# Altium PCB PWM_Controller_SG3525.PcbDoc
Units mm, origin at the board's own origin, x right, y up, seen from the top; angles counter-clockwise.
Board outline 45 x 40 mm, 2 copper layers (Top Layer, Bottom Layer), stack 1.071 mm thick; 44 components, 18 nets, 100 pads, 15 vias.
Unrouted connection lines stored in the file: 89.
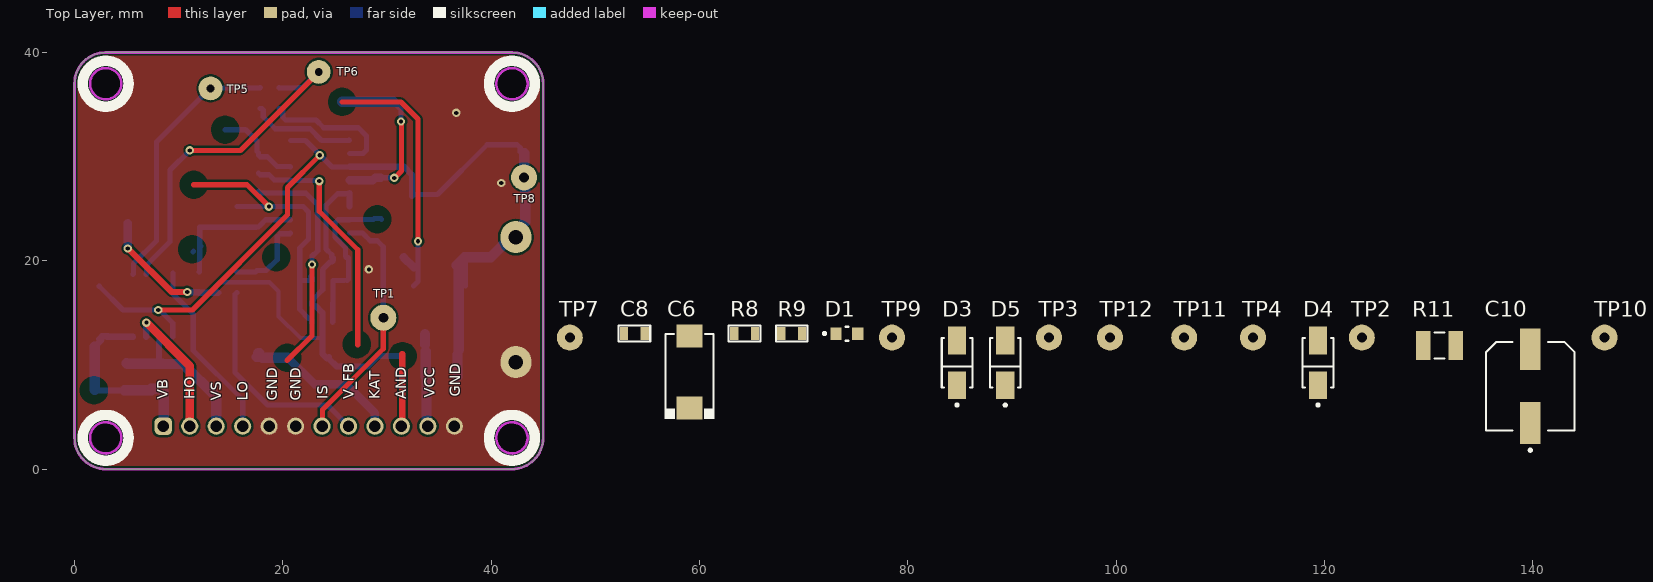
[diagram p0: Top Layer view]
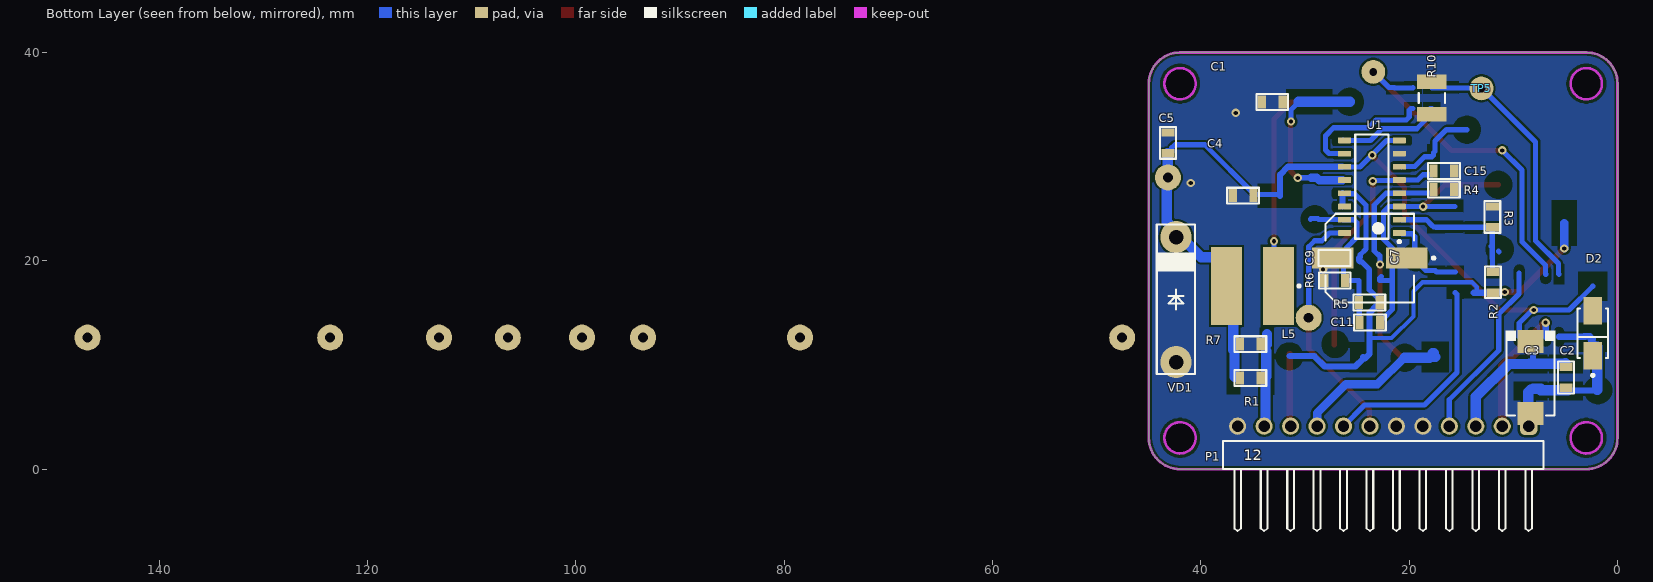
[diagram p1: Bottom Layer view, seen from below]

## Layer stack, top to bottom
Top Solder: solder mask 0.0102, Solder Resist, Dk 3.5
Top Layer: signal copper 0.0356
Dielectric 1: dielectric 1, FR-4, Dk 4.8
Bottom Layer: signal copper 0.0356
Bottom Solder: solder mask 0.0102, Solder Resist, Dk 3.5

## Board outline
0,3 0,37 cw(c3,37) 3,40 42,40 cw(c42,37) 45,37 45,3.05 45,3 cw(c42,3) 42,0 42.029,0 2.999,0 3,0 cw(c3,3)
cut-out: 40.5,3 ccw(c42,3) 42,1.5 ccw(c42,3) 43.5,3 ccw(c42,3) 42,4.5 ccw(c42,3)
cut-out: 1.5,3 ccw(c3,3) 3,1.5 ccw(c3,3) 4.5,3 ccw(c3,3) 3,4.5 ccw(c3,3)
cut-out: 1.5,37 ccw(c3,37) 3,35.5 ccw(c3,37) 4.5,37 ccw(c3,37) 3,38.5 ccw(c3,37)
cut-out: 40.5,37 ccw(c42,37) 42,35.5 ccw(c42,37) 43.5,37 ccw(c42,37) 42,38.5 ccw(c42,37)

## Design rules (kind name [scope] priority, off if disabled: settings)
Clearance Clearance_1 [All vs InNet('GND_1')] p1: gap=0.2 ignorepadtopadclearanceinfootprint=FALSE
Clearance [All vs InNet('GND')] p2: gap=0.2 ignorepadtopadclearanceinfootprint=FALSE except(0.4: Fill-Fill Fill-Poly Fill-Region Fill-Text Fill-Hole Poly-Poly Poly-Region Poly-Text Poly-Hole Region-Region Region-Text Region-Hole)
ComponentClearance [All] p1: gap=-3 collisioncheckmode=3 verticalgap=0.254 showdistances=FALSE
DiffPairsRouting [All] p1: maxlimit=0.254 minlimit=0.254 mostfreqgap=0.254 substack1={A23D90DD-733B-49C5-8102-56B3D284E3A0} toplayer_{a23d90dd-733b-49c5-8102-56b3d284e3a0}_minwidth=0.381 toplayer_{a23d90dd-733b-49c5-8102-56b3d284e3a0}_maxwidth=0.381 toplayer_{a23d90dd-733b-49c5-8102-56b3d284e3a0}_prefwidth=0.381 bottomlayer_{a23d90dd-733b-49c5-8102-56b3d284e3a0}_minwidth=0.381 bottomlayer_{a23d90dd-733b-49c5-8102-56b3d284e3a0}_maxwidth=0.381 bottomlayer_{a23d90dd-733b-49c5-8102-56b3d284e3a0}_prefwidth=0.381 toplayer_minwidth=0.381 toplayer_maxwidth=0.381 toplayer_prefwidth=0.381 bottomlayer_minwidth=0.381 bottomlayer_maxwidth=0.381 bottomlayer_prefwidth=0.381 substack2={0B3DB408-A969-412D-8C07-BA8AE97219D9} toplayer_{0b3db408-a969-412d-8c07-ba8ae97219d9}_minwidth=0.381 toplayer_{0b3db408-a969-412d-8c07-ba8ae97219d9}_maxwidth=0.381 toplayer_{0b3db408-a969-412d-8c07-ba8ae97219d9}_prefwidth=0.381 bottomlayer_{0b3db408-a969-412d-8c07-ba8ae97219d9}_minwidth=0.381 bottomlayer_{0b3db408-a969-412d-8c07-ba8ae97219d9}_maxwidth=0.381 bottomlayer_{0b3db408-a969-412d-8c07-ba8ae97219d9}_prefwidth=0.381 substack3={378827E6-B38F-4565-9D2F-710D8D441C30} toplayer_{378827e6-b38f-4565-9d2f-710d8d441c30}_minwidth=0.381 toplayer_{378827e6-b38f-4565-9d2f-710d8d441c30}_maxwidth=0.381 toplayer_{378827e6-b38f-4565-9d2f-710d8d441c30}_prefwidth=0.381 bottomlayer_{378827e6-b38f-4565-9d2f-710d8d441c30}_minwidth=0.381 bottomlayer_{378827e6-b38f-4565-9d2f-710d8d441c30}_maxwidth=0.381 bottomlayer_{378827e6-b38f-4565-9d2f-710d8d441c30}_prefwidth=0.381 substack4={1E65D4A7-266F-4925-B814-5E9C4A66F8EE} toplayer_{1e65d4a7-266f-4925-b814-5e9c4a66f8ee}_minwidth=0.381 toplayer_{1e65d4a7-266f-4925-b814-5e9c4a66f8ee}_maxwidth=0.381 toplayer_{1e65d4a7-266f-4925-b814-5e9c4a66f8ee}_prefwidth=0.381 bottomlayer_{1e65d4a7-266f-4925-b814-5e9c4a66f8ee}_minwidth=0.381 bottomlayer_{1e65d4a7-266f-4925-b814-5e9c4a66f8ee}_maxwidth=0.381 bottomlayer_{1e65d4a7-266f-4925-b814-5e9c4a66f8ee}_prefwidth=0.381 substack5={93C5D03E-862D-45F8-9871-970EEA9B3F11} toplayer_{93c5d03e-862d-45f8-9871-970eea9b3f11}_minwidth=0.381 toplayer_{93c5d03e-862d-45f8-9871-970eea9b3f11}_maxwidth=0.381 toplayer_{93c5d03e-862d-45f8-9871-970eea9b3f11}_prefwidth=0.381 bottomlayer_{93c5d03e-862d-45f8-9871-970eea9b3f11}_minwidth=0.381 bottomlayer_{93c5d03e-862d-45f8-9871-970eea9b3f11}_maxwidth=0.381 bottomlayer_{93c5d03e-862d-45f8-9871-970eea9b3f11}_prefwidth=0.381 maxuncoupledlength=12.7
Height [All] p1: minheight=0 maxheight=50 prefheight=33
HoleSize [All] p1: absolutevalues=TRUE maxlimit=6 minlimit=0.01 maxpercent=80.000 minpercent=20.000
HoleToHoleClearance [All] p1: gap=0.1 allowstackedmicrovias=TRUE
MinimumSolderMaskSliver [All] p1: minsoldermaskwidth=0.1
PlaneClearance [All] p1: clearance=0.7
PlaneConnect [All] p1: planeconnectstyle=Direct reliefexpansion=0.5 reliefentries=4 reliefconductorwidth=0.5 reliefairgap=0.15
PolygonConnect VQFN20 [HasFootprint('VQFN20')] p1: connectstyle=Direct reliefconductorwidth=0.254 reliefentries=4 polygonreliefangle="90 Angle" airgapwidth=0.254
PolygonConnect [All] p2: connectstyle=Direct reliefconductorwidth=0.3 reliefentries=4 polygonreliefangle="90 Angle" airgapwidth=0.15
RoutingVias [All] p1: holewidth=0.1 width=0.1 viastyle="Through Hole" minholewidth=0 minwidth=0.3 maxholewidth=2 maxwidth=4
ShortCircuit [All] p1: allowed=TRUE
SilkToSolderMaskClearance [IsPad] p1: minsilkscreentomaskgap=0.1 clearancetoexposedcopper=TRUE
SolderMaskExpansion SolderMaskExpansion_Via [IsVia] p1: expansion=0.102 istentingtop=TRUE
SolderMaskExpansion [All] p2: expansion=0.01 istentingtop=FALSE
SupplyNets "Schematic Supply Nets" [InNet('GND')] p1: voltage=0.000
UnRoutedNet [All] p1: checkbadconnections=TRUE
Width [All] p1: maxlimit=5 minlimit=0.2 preferedwidth=0.3 substack1={A23D90DD-733B-49C5-8102-56B3D284E3A0} substack2={0B3DB408-A969-412D-8C07-BA8AE97219D9} substack3={378827E6-B38F-4565-9D2F-710D8D441C30} substack4={1E65D4A7-266F-4925-B814-5E9C4A66F8EE} substack5={93C5D03E-862D-45F8-9871-970EEA9B3F11}
19 further rules are at their usual default settings.

## Components (designator, comment, footprint, x,y, rotation, side; value= is the part's Value field where it differs from the comment)
C1 "1nF 16V" CAP-0805 33.15,35.25 r180 bottom locked
C2 "1nF 16V" CAP-0805 4.95,8.8 r270 bottom
C3 "100uF_16V" CAP-TAN-D 8.35,8.8 r270 bottom
C4 "1nF 16V" CAP-0805 35.95,26.25 r180 bottom locked
C5 "1nF 16V" CAP-0805 43.166,31.317 r270 bottom
C6 "10uF_16V" CAP-TAN-D 59.054,9.321 r90 top
C7 "300uF_25V" CAP_SMD_Size_G 23.802,20.261 r0 bottom
C8 "CAP-NON-POLAR" CAP-0805 53.754,13.021 r0 top
C9 "0.1uF" CAP-0805 27.178,20.261 r180 bottom
C10 "300uF_25V" CAP_SMD_Size_G 139.758,7.971 r90 top
C11 "0.1uF" CAP-0805 23.777,14.086 r0 bottom
C15 "2.2nF 16V" CAP-0805 16.665,28.63 r0 bottom
D1 "0805" LED_RED 74.155,12.996 r0 top
D2 "ES1G" FP-403AE-MFG 2.375,13.05 r90 bottom
D3 "ES1G" FP-403AE-MFG 84.731,10.196 r90 top
D4 "ES1G" FP-403AE-MFG 119.382,10.196 r90 top
D5 "ES1G" FP-403AE-MFG 89.356,10.196 r90 top
L5 "47µH, 1.17A" WE-PD2_7850 35.05,17.575 r0 bottom
P1 "61301211021" 61301211021 22.5,1.35 r180 bottom
R1 "1K" RES-0805 35.25,8.75 r180 bottom
R2 "1K" RES-0805 11.977,17.936 r90 bottom
R3 "2K" RES-0805 12.027,24.211 r90 bottom
R4 "2K" RES-0805 16.677,26.836 r180 bottom
R5 "5,6K" RES-0805 23.827,15.986 r0 bottom
R6 "220" RES-0805 27.152,18.111 r0 bottom
R7 "47" RES-0805 35.25,11.993 r180 bottom
R8 "2K" RES-0805 64.33,13.021 r0 top
R9 "2K" RES-0805 68.855,13.021 r0 top
R10 "RES_1210" RES_SMD_1210_IPC_A 17.835,35.623 r90 bottom
R11 "RES_1210" RES_SMD_1210_IPC_A 131.033,11.871 r0 top
TP1 "" Test_Point#1 29.65,14.527 r0 top
TP2 "" Test_Point#1 123.583,12.621 r0 top
TP3 "" Test_Point#1 93.556,12.621 r0 top
TP4 "" Test_Point#1 113.132,12.621 r0 top
TP5 "" Test_Point#2 13.065,36.546 r180 bottom
TP6 "" Test_Point#2 23.452,38.137 r0 top
TP7 "" Test_Point#1 47.554,12.621 r0 top
TP8 "" Test_Point#1 43.166,28.005 r0 top
TP9 "" Test_Point#1 78.48,12.621 r0 top
TP10 "" Test_Point#1 146.884,12.621 r90 top
TP11 "" Test_Point#1 106.532,12.621 r90 top
TP12 "" Test_Point#1 99.406,12.621 r90 top
U1 "SG3525" SOIC-16-L 23.577,27.111 r0 bottom
VD1 "18V" DO-017AA 42.383,16.275 r270 bottom

## Footprints (in the part's own frame and the unit in brackets; to place one, negate y for a bottom-side part, rotate by r counter-clockwise, add the part's x,y. Pads: shape width x height; smd on the part's side, far side on the other; paste and mask are expansions set on the pad)
61301211021 [mm] "Pin Header, pitch 2.54 mm, THT, Angled, single row, 12p"
  rrect50% 1.65x1.65 hole 1.1: 1(13.97,2.77)
  round 1.65 hole 1.1: 2(11.43,2.77) 3(8.89,2.77) 4(6.35,2.77) 5(3.81,2.77) 6(1.27,2.77) 7(-1.27,2.77) 8(-3.81,2.77) 9(-6.35,2.77) 10(-8.89,2.77) 11(-11.43,2.77) 12(-13.97,2.77)
  silkscreen extent -15.39,-7.27 15.39,1.35, body extent -15.24,-7.27 15.24,3.09, height 2.58
CAP-0805 [mm]
  rect 0.8x1.25 smd mask+0.015: 1(-1,0) 2(1,0)
  silkscreen extent -1.52,-0.76 1.52,0.76, body extent -1,-0.62 1,0.63, height 0.8
CAP-TAN-D [mm]
  rect 2.2x2.5 smd: 1(-3.45,0) 2(3.45,0)
  silkscreen extent -4.5,-2.4 3.65,2.4, body extent -3.8,-2.3 3.8,2.3, height 4
CAP_SMD_Size_G [mm]
  rect 4x2 smd paste+0 mask+0: 1(3.55,0) 2(-3.55,0)
  silkscreen extent -6.27,-4.25 4.25,4.25, body extent -4.5,-4.15 4.5,4.15, height 6.5
DO-017AA [mm]
  oval 3.1x3 hole 1.4: 1(-6,0) 2(6,0)
  silkscreen extent -7.2,-1.85 7.15,1.83, body extent -6.63,-1.7 6.37,1.7, height 3.4
FP-403AE-MFG [mm]
  rect 2.65x1.75 smd paste+0 mask+0: 1(-2.15,0) 2(2.15,0)
  silkscreen extent -4.17,-1.48 2.37,1.48, body extent -2.6,-1.36 2.6,1.36, height 2.5
LED_RED [mm]
  rect 1.1x1.2 smd paste+0 mask+0: 1(-1.05,0) 2(1.05,0)
  silkscreen extent -2.27,-0.67 0.13,0.67, body extent -1.7,-0.77 1.7,0.77, height 0.25
RES-0805 [mm]
  rect 0.8x1.25 smd mask+0.015: 1(-1,0) 2(1,0)
  silkscreen extent -1.52,-0.76 1.52,0.76, body extent -1,-0.62 1,0.63, height 0.6
RES_SMD_1210_IPC_A [mm]
  rect 1.405x2.806 smd paste+0 mask+0: 1(-1.551,0) 2(1.551,0)
  silkscreen extent -0.47,-1.25 0.47,1.25, body extent -1.6,-1.25 1.6,1.25, height 0.6
SOIC-16-L [mm]
  rrect18% 1.25x0.55 smd: 1(-2.625,4.445) 2(-2.625,3.175) 3(-2.625,1.905) 4(-2.625,0.635) 5(-2.625,-0.635) 6(-2.625,-1.905) 7(-2.625,-3.175) 8(-2.625,-4.445) 9(2.625,-4.445) 10(2.625,-3.175) 11(2.625,-1.905) 12(2.625,-0.635) 13(2.625,0.635) 14(2.625,1.905) 15(2.625,3.175) 16(2.625,4.445)
  silkscreen extent -2.75,-5 1.6,5.39, body extent -3,-4.95 3,4.95, height 1.59
Test_Point#1 [mm]
  round 2.5 hole 0.95: 1(0,0)
Test_Point#2 [mm]
  round 2.286 hole 0.762 paste-2539.97 mask+0.102: 1(0,0)
WE-PD2_7850 [mm] "SMD Power Inductor, 2-Leads, body 7.8x7mm"
  rect 3x7.5 smd: 1(-2.5,0) 2(2.5,0)
  silkscreen extent -4.59,-0.12 -4.34,0.12, body extent -3.81,-3.5 3.81,3.5, height 4.95

## Part data
C1 C2 C4 C5 C9 C11 C15: library part CAP-NON-POLAR
C3 C6: library part CAP-POLAR
C7 C10: library part CAP_POL_SMD
D1: library part LED, "WURTH ELEKTRONIK - 151031YS06000 - LED, Yellow, Through Hole, T-1 (3mm), 30 mA, 2 V, 590 nm", Manufacturer_Name="Wurth Elektronik", Manufacturer_Part_Number=151031YS06000, Mouser Part Number=710-151031YS06000, Datasheet Link=https://katalog.we-online.de/led/datasheet/151031YS06000.pdf, Geometry.Height=5.5mm, Mouser Price/Stock=https://www.mouser.co.uk/ProductDetail/Wurth-Elektronik/151031YS06000?qs=LlUlMxKIyB3xSYYW%252BcuBiQ%3D%3D
D2 D3 D4 D5: "Ultrafast"
L5: library part 744775147, "WE-PD2 SMT Power Inductor, size 7850, 47µH, 1.17A, 0.18Ω", Case/Size Code=7850, DC Resistance=0.134Ω, DC Resistance Max=0.18Ω, Inductance=47µH, Manufacturer="Wurth Elektronik", Operating Temperature Max=125°C, Operating Temperature Min=-40°C, Rated Current=1.17A, Saturation Current=1.24A, Self Resonant Frequency=12MHz, Category="Unshielded Power Inductors", ComponentLink1Description="Website Link", ComponentLink1URL=https://www.we-online.com/redexpert/article/744775147?ad, ComponentLink2Description="Datasheet Link", ComponentLink2URL=https://www.we-online.com/redexpert/spec/744775147?ad, Height=4.95mm, Length=7.8mm, Manufacturer Part Number=744775147, Match Code=WE-PD2, Mount="Surface Mount", Packaging="Tape and Reel", Width=7mm, Simulation ModelName=7850_744775147_47u, Simulation ModelText="******* / .subckt 7850_744775147_47u 1 2 / Rp 1 2 40000 / Cp 1 2 4p / Rs 1 N3 0.1343 / L1 N3 2 47u / .ends 7850_744775147_47u", Simulation PortMap=(1:1),(2:2)
P1: "WR-PHD Pin Header, THT, Angled, pitch 2.54mm, 1 Row, 12P", Contact Resistance=20mΩ, Manufacturer="Wurth Elektronik", Operating Temperature Max=105°C, Operating Temperature Min=-40°C, Rated Current=3A, Withstanding Voltage=500V, Working Voltage=250V, Category="Board-to-Board Connectors", ComponentLink1Description="Website Link", ComponentLink1URL=https://www.we-online.com/redexpert/article/61301211021?ad, ComponentLink2Description="Datasheet Link", ComponentLink2URL=https://www.we-online.com/redexpert/spec/61301211021?ad, Gender="Pin Header", Manufacturer Part Number=61301211021, Match Code=WR-PHD, Mount="Through Hole", Number of Pins=12, Number of Rows=1, Orientation=Angled, Packaging=Bag, Pitch=2.54mm
R1 R2 R3 R4 R5 R6 R7 R8 R9: library part RES-CONST
TP1 TP2 TP3 TP4 TP5 TP6 TP7 TP8 TP9 TP10 TP11 TP12: library part TP_PCB?, "Test_Point"
VD1: library part ZENER

## Via types
v1: diameter 0.8, hole 0.4, Top Layer to Bottom Layer, tented both sides, 15 vias

## Nets (pads, with @x,y where several pads share a name; then routed paths per layer and width w, separated by ;. In a path a pad name is that pad's centre, name@x,y a point inside that pad or via, vN(x,y) a via of type N, cw(c..) or ccw(c..) an arc to the next point about the centre after c; other vN are vias at no path point)
GND: C1.1 C2.1 C3.2 C4.1 C5.1 C6.2 C7.2 C8.1 C9.1 C10.2 C11.1 C15.1 D1.2 D3.2 D5.2 P1.3 P1.4 P1.5 P1.6 P1.8 P1.12 R1.2 R4.1 R5.2 R8.2 TP7.1 U1.12 VD1.2 | length 60.5
  Top Layer w0.5: v1(30.708,27.961) 30.75,27.961 31.409,28.62 31.409,33.232 31.35,33.291 v1(31.35,33.372)
  Bottom Layer w0.5: 5.625,18.7 5.675,18.75 5.675,19.725 7.865,21.915 7.865,31.4 13.063,36.598 16.077,36.598 17.81,36.598 17.835,36.623 ; 9.475,18.817 9.454,18.796 9.454,18.16 9.475,18.139 9.475,16.816 11.402,14.889 11.402,11.401 16.15,6.653 P1.4 ; 29.389,27.961 v1(30.708,27.961) ; 30.6,35.25 31.35,34.5 v1(31.35,33.372)
  Bottom Layer w0.8: U1.12@26.402,27.746 28.647,27.746 28.862,27.961 29.389,27.961
  Bottom Layer w1: 25.7,35.25 30.6,35.25
NetC1_2: C1.2 P1.9 R1.1 TP1.1 U1.1 | length 10.3
  Bottom Layer w0.5: 17.835,34.623 17.974,34.623 18.124,34.473 18.124,33.826 19.27,32.68 22.598,32.68 23.722,31.556 26.402,31.556 26.352,31.606
NetC2_2: C2.2 C3.1 R2.1 R3.1 TP2.1 U1.16 | length 18.6
  Bottom Layer w0.6: 1.875,7.575 1.939,7.639 ; 1.875,7.86 2.197,7.537 4.776,7.537 C2.2@4.788,7.55 ; 1.939,11.769 2.604,12.434 ; 2.375,12.469 2.656,12.75 3.104,12.75 3.234,12.75 ; 3.104,12.7 5.163,12.7 5.625,12.7
  Bottom Layer w1: 1.939,7.639 1.939,11.769 ; C2.2@4.788,7.55 4.813,7.575 7.357,7.575 ; 7.357,7.699 8.118,7.699 ; 8.35,7.6 8.575,7.375 8.575,4.165 8.53,4.12
NetC4_2: C4.2 R3.2 R4.2 TP4.1 U1.2
  other v1: 28.267,19.174 40.975,27.47
NetC5_2: C5.2 D1.1 R6.1 TP3.1 | length 20.8
  Bottom Layer w0.5: 15.577,16.936 15.552,16.936 15.402,16.786 15.402,9.275 18.527,6.15 24.28,6.15 26.31,4.12
NetC6_1: C6.1 U1.8
NetC7_1: C7.1 C9.2 L5.1 TP8.1 U1.15 | length 63.4
  Top Layer w0.5: 20.411,10.419 22.802,12.81 v1(22.802,19.636) ; 25.7,35.25 31.333,35.25 32.975,33.608 v1(32.975,21.875)
  Bottom Layer w0.5: 17.665,26.686 17.665,26.673 17.827,26.511 20.717,26.511 ; 20.752,26.476 22.237,26.476 23.352,25.361 23.352,20.937 23.001,20.586 22.902,20.586 22.802,20.486 22.802,20.261 v1@22.802,19.636 ; L5.1 32.975,18 v1(32.975,21.875)
  Bottom Layer w0.8: 20.516,10.686 23.052,8.15 26.075,8.15 28.833,5.392 28.833,4.137 ; L5.1@31.6,20.337 L5.1@32.575,19.362
  Bottom Layer w1: 17.502,10.761 18.095,10.761 ; 17.727,11.136 17.645,11.136 18.095,10.686 20.427,10.686 ; 28.833,4.137 28.85,4.12
NetC8_2: C8.2 R8.1 R9.1 TP9.1 U1.10 | length 26.1
  Top Layer w0.8: v1(6.903,14.066) 11.07,9.898 11.07,4.12
  Bottom Layer w0.5: 19.635,34.623 19.848,34.623 19.998,34.473 19.998,33.818 20.291,33.525 23.175,33.525 23.925,32.775 27.269,32.775 28.05,31.994 28.05,30.634 27.702,30.286 U1.10@26.402,30.286
  Bottom Layer w0.6: 6.903,12.708 v1(6.903,14.066)
NetC10_1: C10.1 C11.2 D2.1 D4.1 L5.2 R10.1 R11.1 TP10.1 U1.13 VD1.1 | length 13.5
  Bottom Layer w0.5: 11.977,18.936 12.001,18.96 12.001,20.222 12.025,20.246 12.025,20.85 12.025,21.3 ; 12.125,21.4 12.025,21.3 ; 20.752,23.936 18.351,23.936 17.802,23.387 17.652,23.236 17.427,23.236 17.415,23.224 15.652,23.224 13.827,23.224 12.04,23.224 12.027,23.211 12.025,23.209 12.025,21.3
NetC15_2: C15.2 R7.1 TP6.1 U1.5 | length 57.1
  Top Layer w0.5: v1(11.07,30.597) 15.942,30.597 TP6.1@23.385,38.04 ; v1(23.5,27.65) 23.5,24.758 27.195,21.063 27.195,11.91
  Bottom Layer w0.5: 6.895,18.7 6.914,18.719 6.914,19.564 9.175,21.825 9.175,28.702 v1(11.07,30.597) ; C15.2@17.677,28.393 17.815,28.255 18.668,28.255 19.177,27.746 20.752,27.746 20.8,27.698 23.452,27.698 v1(23.5,27.65) ; 19.635,36.623 19.66,36.598 21.36,36.598 21.385,36.573 21.435,36.623 21.938,36.623 TP6.1@23.577,38.262
NetD2_2: D2.2 D3.1 P1.1 TP11.1 U1.11 | length 28.3
  Top Layer w0.5: 11.45,27.3 16.568,27.3 v1(18.668,25.2)
  Bottom Layer w0.5: 15.616,25.206 17.427,25.206 17.439,25.218 18.65,25.218 v1(18.668,25.2) 18.671,25.203 20.749,25.203 20.752,25.206 21.957,25.206 22.477,24.686 22.477,22.061 21.627,21.211 21.627,18.111 21.627,15.311 22.477,14.461 22.627,14.461 22.777,14.311 22.777,14.086 ; 21.627,18.111 22.827,18.111 22.827,18.336 22.677,18.486
NetD4_2: D4.2 D5.1 P1.2 TP12.1 U1.14 | length 15.9
  Bottom Layer w0.5: 24.777,14.086 24.802,14.111 24.802,15.961 24.827,15.986 24.827,18.111 25.927,18.111 ; 26.152,18.111 26.302,18.261 26.302,20.311 ; 26.178,20.261 26.028,20.411 26.028,21.251 25.002,22.277 25.002,23.643 25.295,23.936 26.402,23.936 26.427,23.961 28.688,23.961 28.777,24.05 29.413,24.05 29.477,23.986
NetP1_7: P1.7 R9.2 | length 24.1
  Top Layer w0.5: P1.7@23.802,4.152 23.802,5.703 29.65,11.551 29.65,14.527
  Bottom Layer w0.5: 26.402,22.666 27.649,22.666 28.39,21.925 29.076,21.925 29.65,21.351 29.65,14.527 29.65,13.85
NetP1_10: P1.10 R2.2 | length 62.6
  Top Layer w0.6: v1@5.172,21.175 9.347,17 v1(10.825,17) ; P1.10 31.475,4.205 31.475,11.051
  Bottom Layer w0.4: 13.521,17.217 13.521,17.475 13.982,17.936 18.739,17.936 19.6,17.075 19.6,14.666 21.691,12.575 23.802,12.575
  Bottom Layer w0.5: 22.927,16.311 23.827,17.211 23.827,19.174 24.589,19.936 ; 24.802,20.261 24.702,20.361 24.702,20.586 24.152,21.136 24.152,25.336 25.256,26.44 26.366,26.44 26.402,26.476
  Bottom Layer w0.6: v1(10.825,17) 10.857,16.968 11.945,16.968 11.977,16.936 13.802,16.936 ; 22.927,16.311 22.827,15.986 22.827,15.761 22.927,15.661 23.152,15.661 23.802,15.011 23.802,12.575 23.802,11.061 24.252,10.611 ; 24.402,10.761 24.402,10.611 25.163,9.85 28.125,9.85 29.125,10.85 31.5,10.85 ; 24.702,19.936 24.802,20.036 24.802,20.261 ; 26.402,25.206 26.402,26.476
  Bottom Layer w0.8: v1(5.125,21.175) 5.125,23.625
NetP1_11: P1.11 R10.2 R11.2 | length 8.2
  Bottom Layer w1: 33.65,11.993 33.65,12.934 ; 33.7,11.306 33.725,11.281 33.725,10.088 ; 33.725,10.018 33.725,8.895 33.795,8.825 33.795,4.715 33.806,4.704 33.806,4.244 P1.11
NetR5_1: R5.1 TP5.1 U1.6 | length 97.1
  Top Layer w0.5: v1(8.05,15.275) 11.321,15.275 20.46,24.415 20.46,27.035 v1(23.55,30.125)
  Bottom Layer w0.5: 2.375,17.55 4.65,15.275 v1(8.05,15.275) 8.107,15.218 8.23,15.218 9.435,14.013 9.435,12.7 ; 14.463,32.588 16.424,32.588 17.515,31.496 17.515,30.511 17.665,30.361 ; 17.677,30.125 17.815,29.986 18.529,29.986 19.47,29.045 20.723,29.045 U1.6@20.752,29.016 ; 20.752,31.556 22.182,31.556 24.722,29.016 26.402,29.016 ; 32.4,26.25 32.518,26.368 34.857,26.368 39.629,31.14 42.498,31.14 42.791,30.847 42.791,30.467 42.941,30.317 43.166,30.317 ; 37.55,17.575 37.55,20.347
  Bottom Layer w0.6: 26.402,29.016 31.645,29.016 32.4,28.261 32.4,26.25
  Bottom Layer w1: 36.711,19.576 37.483,20.347 39.964,20.347 41.459,21.842 41.904,21.842 ; 36.775,8.881 36.775,11.001 ; 36.875,11.445 36.875,19.438 ; 42.383,22.275 42.383,22.866 43.275,23.758 43.275,27.896 43.166,28.005 43.166,30.317
NetR6_2: R6.2 U1.9 | length 15.6
  Bottom Layer w0.58: 8.156,12.966 8.161,12.961 8.161,12.241 8.118,12.197 8.118,10.433 8.35,10.2
  Bottom Layer w1: 5.018,10.168 5.085,10.1 8.45,10.1 8.463,10.088 10.462,10.088 13.61,6.94 13.61,4.12
NetR7_2: R7.2 U1.7
pads on no net: U1.3 U1.4
copper on no net: | length 8.1
  Bottom Layer w0.5: 11.375,20.875 11.421,20.921 ; 15.577,18.936 17.377,18.936 17.51,19.069 18.404,19.069 19.415,20.081 19.47,20.081 19.47,22.298 19.763,22.591 20.677,22.591 20.752,22.666
  other v1: 36.65,34.2

## Polygon pours and split planes (outlines as drawn)
NetC4_2 on Bottom Layer "NONET_L-01_P-001" (solid, pour order 0): -0.075,0 0,0.075 0,40 45,40 45,0.005
NetC4_2 on Top Layer "NONET_L-01_P-001" (solid, pour order 1): -0.075,0 0,0.075 0,40 45,40 45,0.005

## Keep-outs
Keep-Out Layer:
  circle w0.254: c42,3 r1.5
  circle w0.254: c3,37 r1.5
  circle w0.254: c3,3 r1.5
  circle w0.254: c42,37 r1.5
  lines w0.254: 2.963,40 42.017,40 ; 2.999,0 42.029,0 ; 3,0 cw(c3,3) 0,3 0,37 cw(c3,37) 3,40 ; 42,0 ccw(c42,3) 45,3 ; 42,40 cw(c42,37) 45,37 45,3.05

## Silkscreen, mask and mechanical layers (free items; w line width, h text height)
Top Overlay:
  circle w1: c42,3 r2.2
  circle w1: c42,37 r2.2
  circle w1: c3,3 r2.2
  circle w1: c3,37 r2.2
  text "GND" at 37.041,6.94 h1 r90
  text "VCC" at 34.571,6.852 h1 r90
  text "HO" at 11.531,6.728 h1 r90
  text "AND" at 31.851,6.728 h1 r90
  text "VB" at 8.969,6.686 h1 r90
  text "IS" at 24.298,6.686 h1 r90
  text "V_FB" at 26.792,6.686 h1 r90
  text "KAT" at 29.321,6.686 h1 r90
  text "LO" at 16.638,6.577 h1 r90
  text "GND" at 19.446,6.577 h1 r90
  text "VS" at 14.096,6.544 h1 r90
  text "GND" at 21.703,6.544 h1 r90

## Text inside footprints (layer, text, board x,y; h text height)
P1: Bottom Overlay "12" at 35.887,0.85 h1.02